# Altium PCB Copy of PCB1.PcbDoc
Units mm, origin at the board's own origin, x right, y up, seen from the top; angles counter-clockwise.
Board outline 152.4 x 101.6 mm, 6 copper layers (Top Layer 1, Top Layer, Int1 (GND), Int2 (PWR), Bottom Layer, Bottom Layer 1), stack 1.887 mm thick; 7 components, 27 nets, 107 pads, 29 vias.
Unrouted connection lines stored in the file: 37.
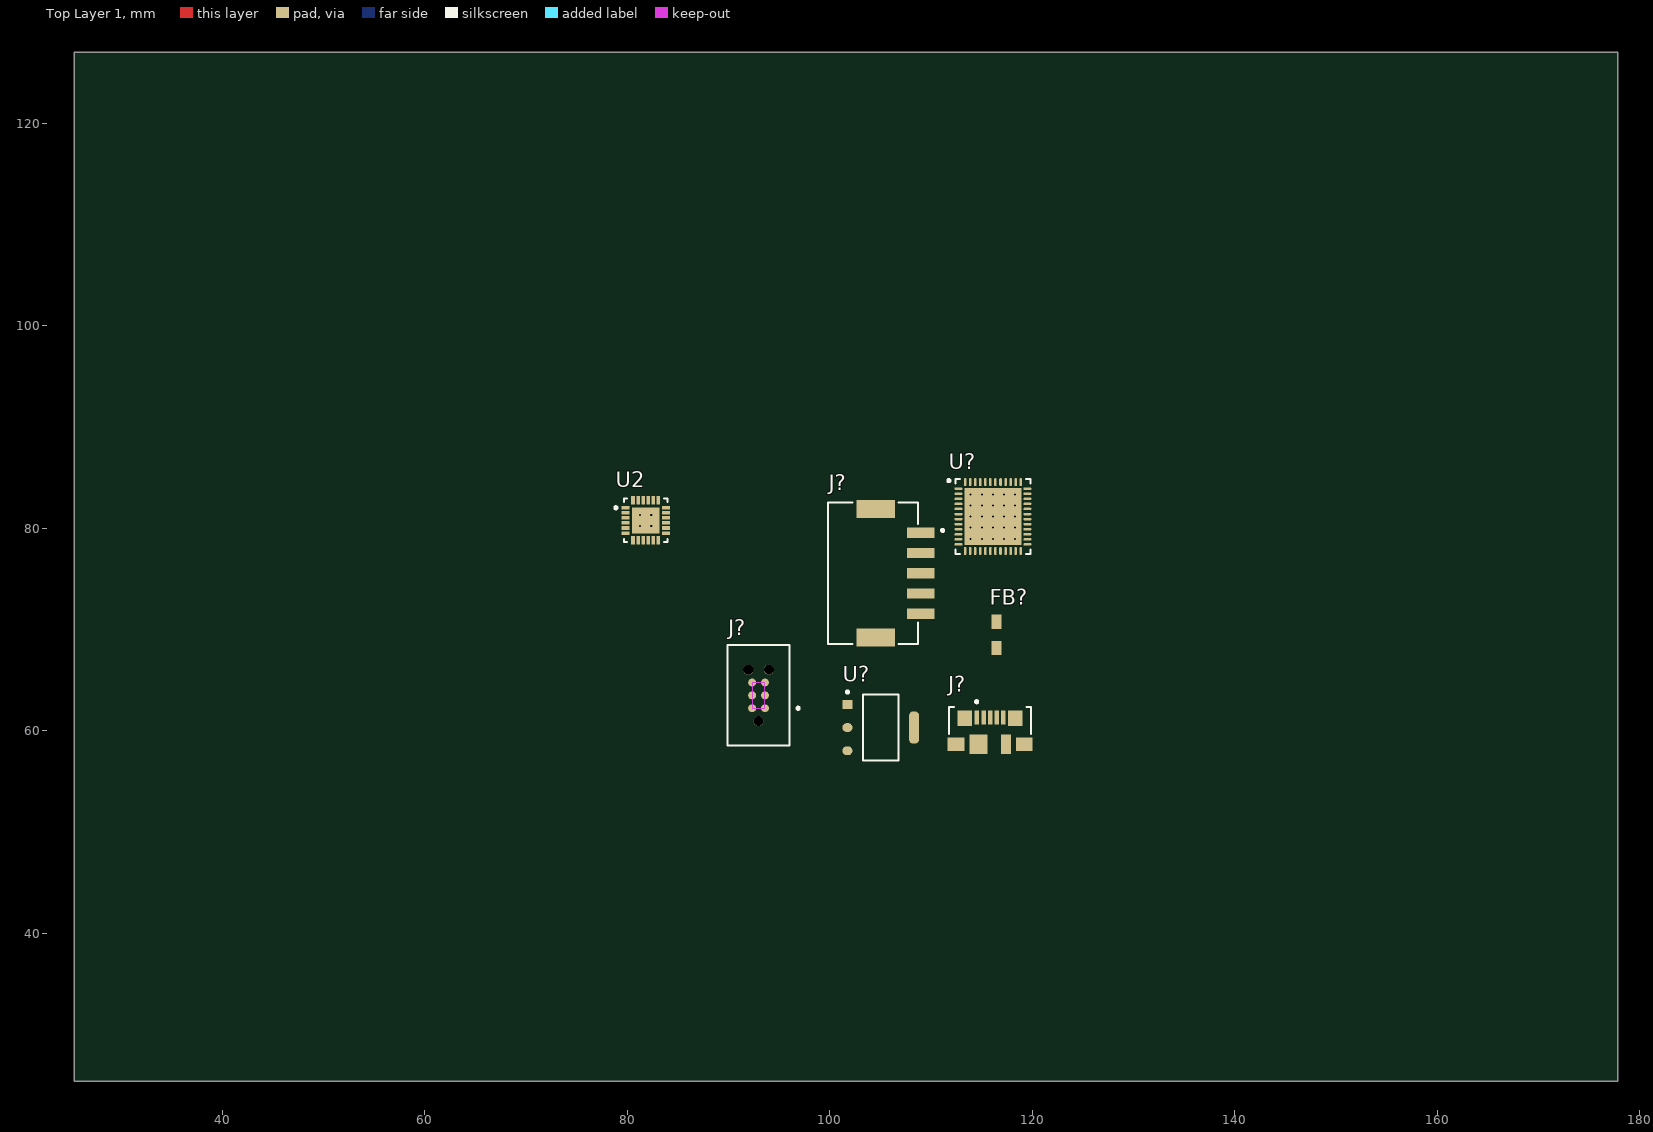
[diagram p0: Top Layer 1 view]
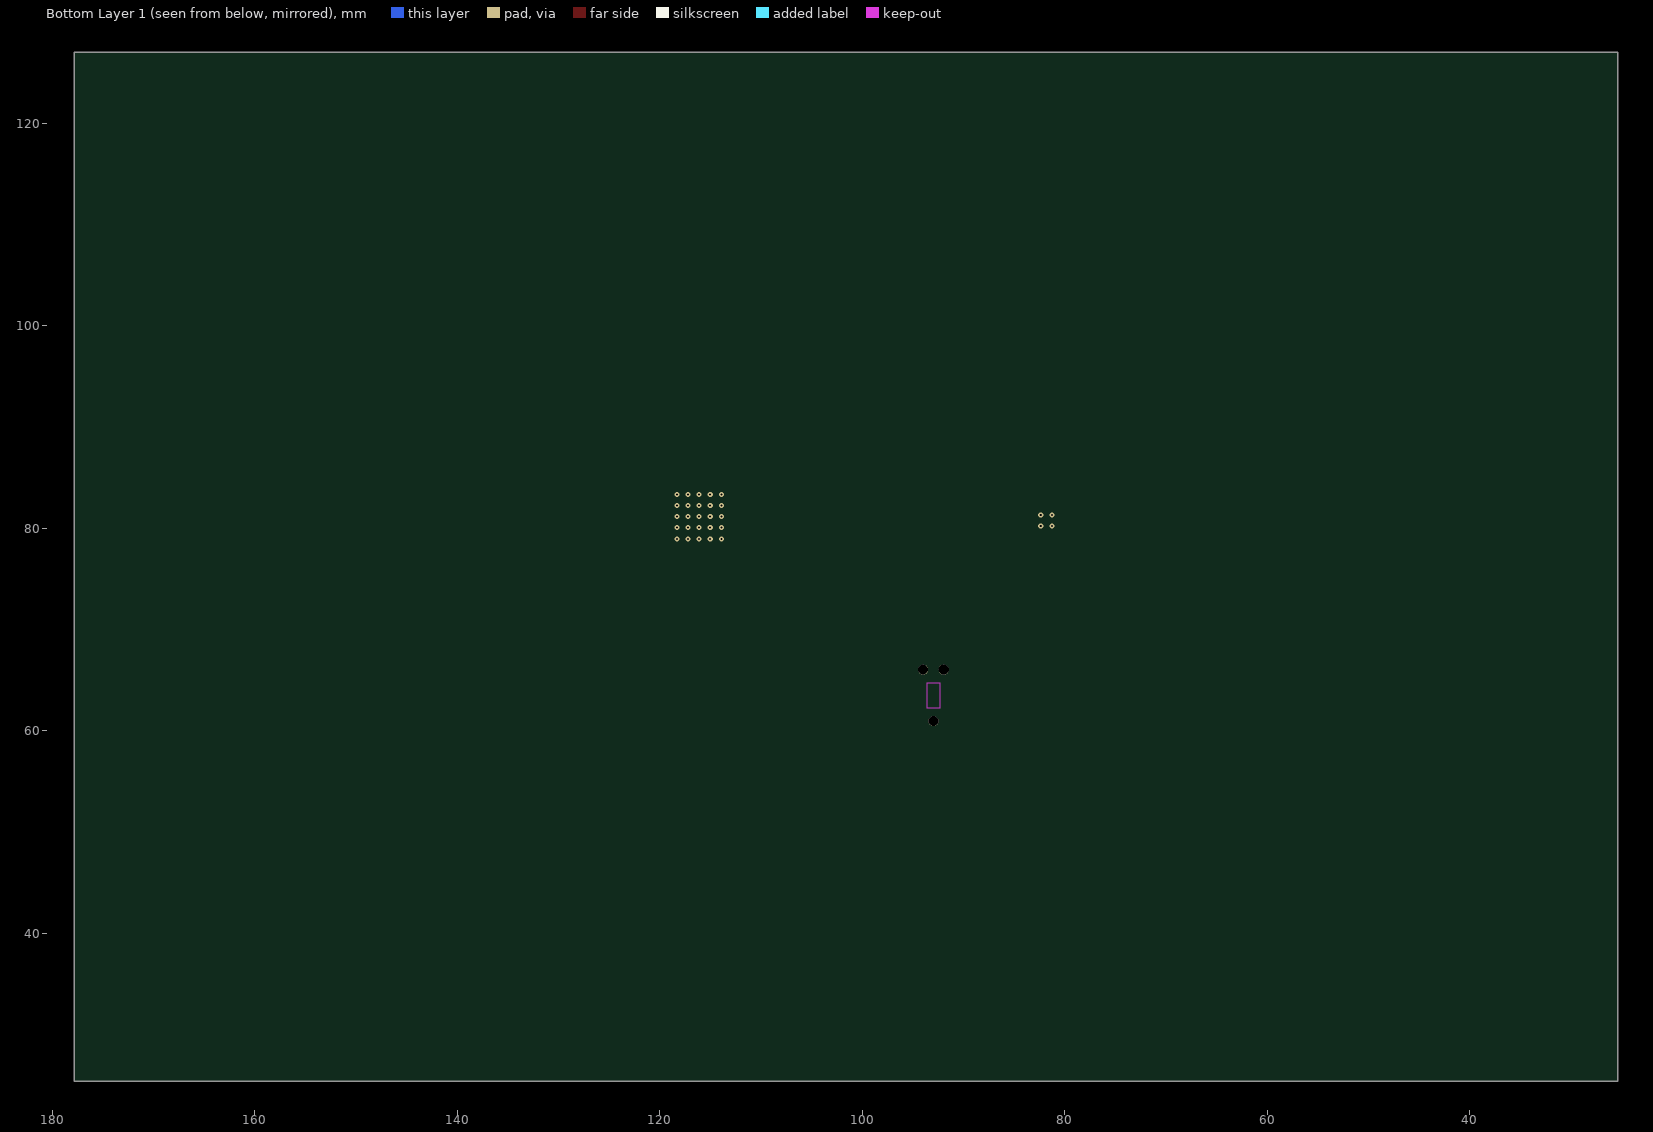
[diagram p1: Bottom Layer 1 view, seen from below]
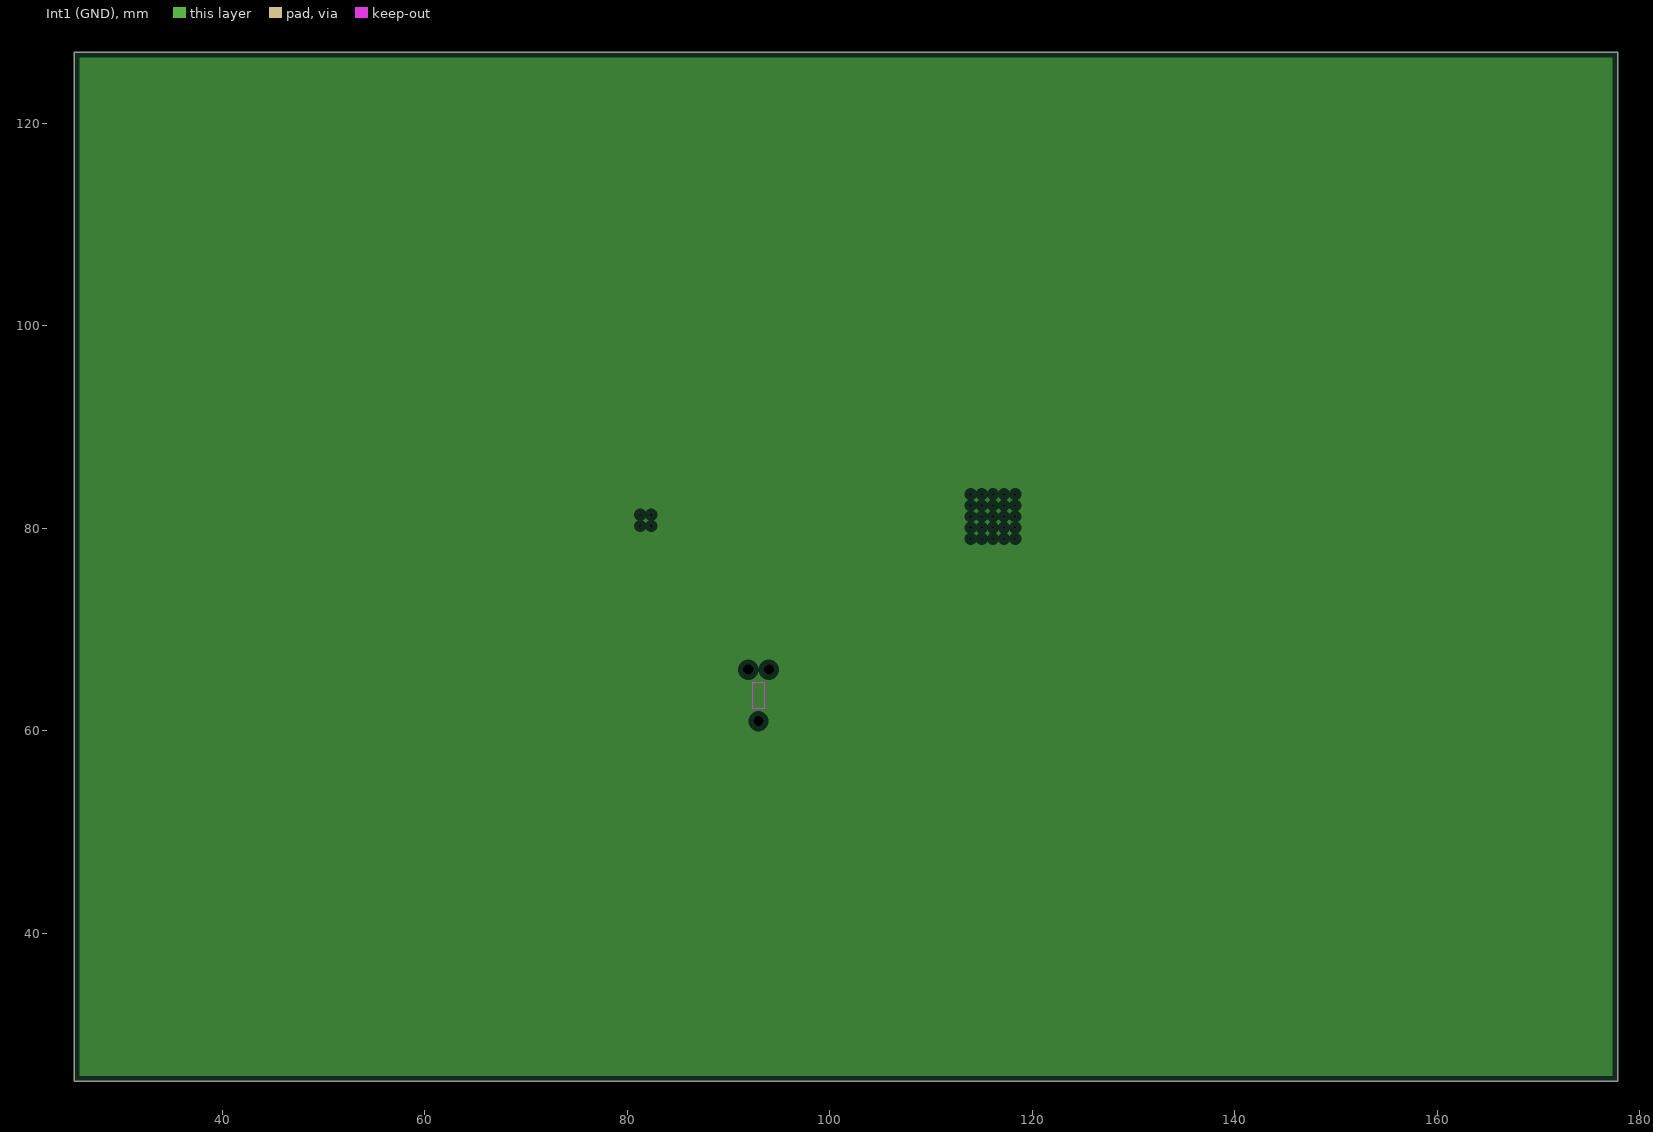
[diagram p2: Int1 (GND), clearances drawn from the general rule]
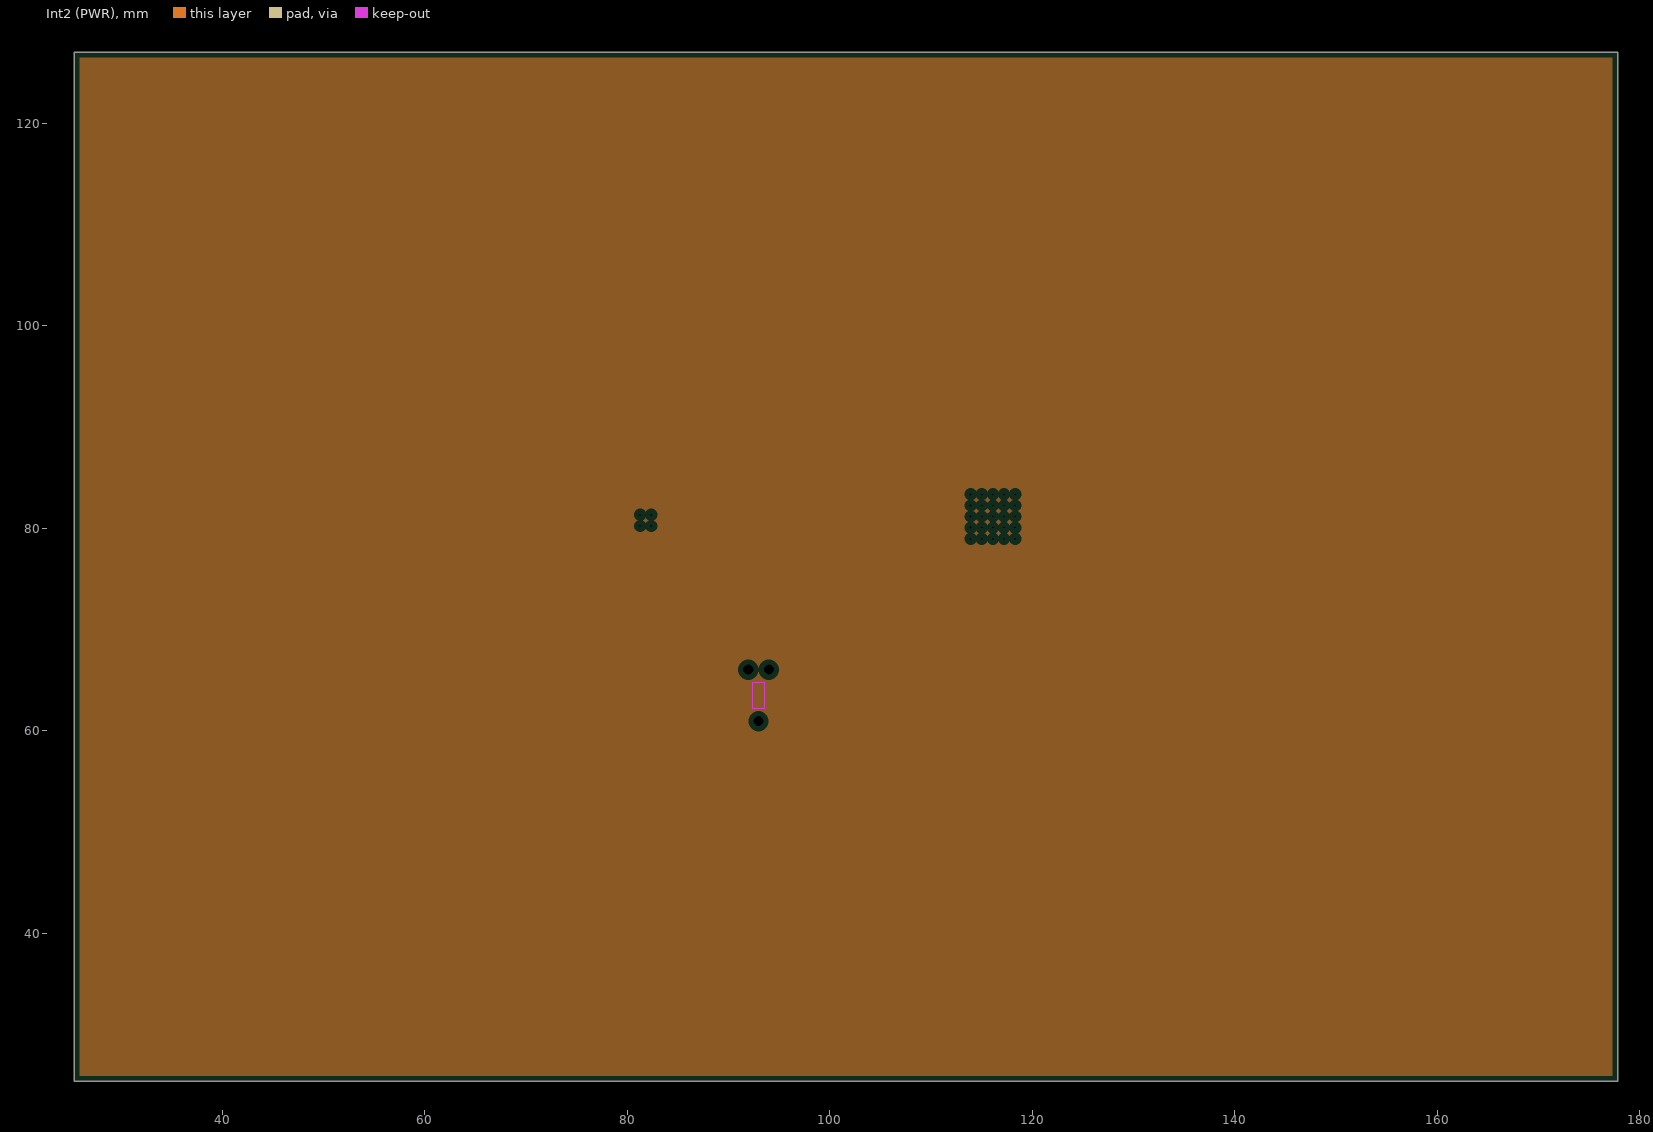
[diagram p3: Int2 (PWR), clearances drawn from the general rule]

## Layer stack, top to bottom
Top Layer 1: signal copper 0.105
Dielectric 2: prepreg 0.0711, PP-006, Dk 4.1
Top Layer: signal copper 0.0175
Dielectric 1: prepreg 0.2, PP-017, Dk 4.6
Int1 (GND): plane copper 0.0175
Dielectric 3: core 1.065, Core-039, Dk 4.6
Int2 (PWR): plane copper 0.0175
Dielectric 5: prepreg 0.2, PP-017, Dk 4.6
Bottom Layer: signal copper 0.0175
Dielectric 4: prepreg 0.0711, PP-006, Dk 4.1
Bottom Layer 1: signal copper 0.105

## Board outline
25.4,25.4 177.8,25.4 177.8,127 25.4,127

## Design rules (kind name [scope] priority, off if disabled: settings)
Clearance [All] p1: gap=0.254 ignorepadtopadclearanceinfootprint=FALSE
DiffPairsRouting [All] p1: maxlimit=0.254 minlimit=0.254 mostfreqgap=0.254 toplayer_minwidth=0.381 toplayer_maxwidth=0.381 toplayer_prefwidth=0.381 midlayer1_minwidth=0.381 midlayer1_maxwidth=0.381 midlayer1_prefwidth=0.381 midlayer2_minwidth=0.381 midlayer2_maxwidth=0.381 midlayer2_prefwidth=0.381 bottomlayer_minwidth=0.381 bottomlayer_maxwidth=0.381 bottomlayer_prefwidth=0.381 maxuncoupledlength=12.7
PlaneClearance [All] p1: clearance=0.508
PlaneConnect [All] p1: planeconnectstyle=Relief reliefexpansion=0.508 reliefentries=4 reliefconductorwidth=0.254 reliefairgap=0.254
PolygonConnect [All] p1: connectstyle=Relief reliefconductorwidth=0.254 reliefentries=4 polygonreliefangle="90 Angle" airgapwidth=0.254
RoutingVias [All] p1: holewidth=0.711 width=1.27 viastyle="Through Hole" minholewidth=0.711 minwidth=1.27 maxholewidth=0.711 maxwidth=1.27
SolderMaskExpansion [All] p1: expansion=0 istentingtop=FALSE
SupplyNets "Schematic Supply Nets_6" [InNet('NetC1_2')] p1: voltage=0.000
SupplyNets "Schematic Supply Nets_5" [InNet('VBUS')] p2: voltage=0.000
SupplyNets "Schematic Supply Nets_4" [InNet('+5V')] p3: voltage=0.000
SupplyNets "Schematic Supply Nets_3" [InNet('+3V3')] p4: voltage=0.000
SupplyNets "Schematic Supply Nets_2" [InNet('GND')] p5: voltage=0.000
SupplyNets "Schematic Supply Nets_1" [InNet('VCC')] p6: voltage=0.000
Width [All] p1: maxlimit=0.254 minlimit=0.254 preferedwidth=0.254
27 further rules are at their usual default settings.

## Classes and differential pairs
differential pair USB_D: +USB_D_P -USB_D_N

## Components (designator, comment, footprint, x,y, rotation, side; value= is the part's Value field where it differs from the comment)
FB? "120R" WE-CBF_0805_L2W1.2H0.9_HC 116.459,69.469 r90 top
J? "SM05B-PASS-TB(LF)(SN)" FP-SM05B-PASS-TB_LF_SN-MFG 104.267,75.565 r90 top
J? "DNP" FP-TC2030-MCP-NL-MFG 92.964,63.5 r90 top
J? "473460001" FP-473460001-MFG 115.831,59.024 r0 top
U2 "MPU-6050" IS-QFN-24_V 81.82,80.776 r0 top (schematic designator U?)
U? "ams1117" FP-ams1117-IPC_C 105.029,60.325 r0 top
U? "STM32F411CEU6" STM-UFQFPN48_L 116.107,81.157 r0 top

## Footprints (in the part's own frame and the unit in brackets; to place one, negate y for a bottom-side part, rotate by r counter-clockwise, add the part's x,y. Pads: shape width x height; smd on the part's side, far side on the other; paste and mask are expansions set on the pad)
FP-473460001-MFG [mm]
  rect 0.45x1.38 smd paste+0 mask+0: 1(-1.3,2.31) 2(-0.65,2.31) 3(0,2.31) 4(0.65,2.31) 5(1.3,2.31)
  rect 1.425x1.55 smd paste+0 mask+0: 6(-2.488,2.225) 7(2.488,2.225)
  rect 1.65x1.3 smd paste+0 mask+0: 8(-3.375,-0.35) 11(3.375,-0.35)
  rect 1.8x1.9 smd paste+0 mask+0: 9(-1.15,-0.35)
  rect 1x1.9 smd paste+0 mask+0: 10(1.55,-0.35)
  silkscreen extent -4.05,0.67 4.05,3.97, body extent -4.3,-2.48 4.3,3.45, height 0.25
FP-ams1117-IPC_C [mm]
  rect 1.004x0.872 smd paste+0 mask+0: 1(-3.295,2.29)
  rrect100% 1.004x0.872 smd paste+0 mask+0: 2(-3.295,0) 3(-3.295,-2.29)
  rrect87% 1.004x3.182 smd paste+0 mask+0: 4(3.295,0)
  silkscreen extent -3.42,-3.25 1.75,3.62, body extent -3.9,-3.35 3.9,3.35, height 0.25
FP-SM05B-PASS-TB_LF_SN-MFG [mm]
  rect 1x2.7 smd paste+0 mask+0: 1(4,-4.7) 2(2,-4.7) 3(0,-4.7) 4(-2,-4.7) 5(-4,-4.7)
  rect 1.8x3.8 smd paste+0 mask+0: 6(-6.35,-0.25) 7(6.35,-0.25)
  silkscreen extent -7,-7 7,4.45, body extent -7.35,-6.15 7.35,4.55, height 0.25
FP-TC2030-MCP-NL-MFG [mil]
  round 30.98 smd paste-39370.1 mask+0: 1(-50,-25) 2(-50,25) 3(0,-25) 4(0,25) 5(50,-25) 6(50,25)
  round 39.02 hole 39.02 unplated paste-99999 mask+0: ""(-100,0) ""(100,-40) ""(100,40)
  Keep-Out Layer region: -50,-25 50,-25 50,25 -50,25
  silkscreen extent -195,-159 195,120, body extent -199,-124 199,124, height 10
IS-QFN-24_V [mm] "QFN, 24-Leads, Body 4x4mm, Pitch 0.5mm, Thermal Pad 2.7x2.6mm"
  rect 0.8x0.35 smd: 1(-2,1.25) 2(-2,0.75) 3(-2,0.25) 4(-2,-0.25) 5(-2,-0.75) 6(-2,-1.25) 13(2,-1.25) 14(2,-0.75) 15(2,-0.25) 16(2,0.25) 17(2,0.75) 18(2,1.25)
  rect 0.35x0.85 smd mask+0.102: 7(-1.25,-1.975) 8(-0.75,-1.975) 9(-0.25,-1.975) 10(0.25,-1.975) 11(0.75,-1.975) 12(1.25,-1.975) 19(1.25,1.975) 20(0.75,1.975) 21(0.25,1.975) 22(-0.25,1.975) 23(-0.75,1.975) 24(-1.25,1.975)
  rect 2.7x2.6 smd: 25(0,0)
  silkscreen extent -3.07,-2.15 2.15,2.15, body extent -2,-2 2,2, height 0.95
STM-UFQFPN48_L [mm] "QFN, 48-Leads, Body 7.1x7.1mm, Pitch 0.5mm, Thermal Pad 5.6x5.6mm, IPC High Density"
  oval 0.8x0.25 smd: 1(-3.4,2.75) 2(-3.4,2.25) 3(-3.4,1.75) 4(-3.4,1.25) 5(-3.4,0.75) 6(-3.4,0.25) 7(-3.4,-0.25) 8(-3.4,-0.75) 9(-3.4,-1.25) 10(-3.4,-1.75) 11(-3.4,-2.25) 12(-3.4,-2.75) 25(3.4,-2.75) 26(3.4,-2.25) 27(3.4,-1.75) 28(3.4,-1.25) 29(3.4,-0.75) 30(3.4,-0.25) 31(3.4,0.25) 32(3.4,0.75) 33(3.4,1.25) 34(3.4,1.75) 35(3.4,2.25) 36(3.4,2.75)
  oval 0.25x0.8 smd: 13(-2.75,-3.4) 14(-2.25,-3.4) 15(-1.75,-3.4) 16(-1.25,-3.4) 17(-0.75,-3.4) 18(-0.25,-3.4) 19(0.25,-3.4) 20(0.75,-3.4) 21(1.25,-3.4) 22(1.75,-3.4) 23(2.25,-3.4) 24(2.75,-3.4) 37(2.75,3.4) 38(2.25,3.4) 39(1.75,3.4) 40(1.25,3.4) 41(0.75,3.4) 42(0.25,3.4) 43(-0.25,3.4) 44(-0.75,3.4) 45(-1.25,3.4) 46(-1.75,3.4) 47(-2.25,3.4) 48(-2.75,3.4)
  rect 5.6x5.6 smd: 49(0,0)
  silkscreen extent -4.47,-3.7 3.7,3.7, body extent -3.55,-3.55 3.55,3.55, height 0.6
WE-CBF_0805_L2W1.2H0.9_HC [mm] "SMD EMI Suppression Ferrite  Bead, body 2.00x1.20mm"
  rect 1.4x1 smd: 1(-1.3,0) 2(1.3,0)
  body extent -1,-0.6 1,0.6, height 0.9

## Part data
FB?: library part CMP-03913-130924299-1, "742792025 Ferrite Bead, Suppression, 120 Ohm, 5A Rohs Compliant: Yes", Current Rating=3A, Max Operating Temperature=125°C, Min Operating Temperature=-55°C, Height=900µm, Length=2mm, NexarPartId=130924299, RoHS=Compliant, Width=1.2mm
J?: library part CMP-17439-000533-1, "Wire-To-Board Connector, Pa Series, Surface Mount, Header, 5, 2 Mm, Tin Plated Contacts Rohs Compliant: Yes", Color=Beige, Contact Material=Copper, Contact Plating=Tin, Gender=Male, Lead Free="Lead Free", Mount="Surface Mount", Number Of Contacts=5, Number of Positions=5, Number of Rows=1, Packaging="Cut Tape", Pitch=2mm, Reach SVHC Compliant=Yes, Termination=Crimp
J?: library part CMP-205963-000002-1, "CABLE TAG-CONNECT IN-CIRCUIT", Package Quantity=1, Lead Free="Lead Free", Reach SVHC Compliant=Yes, RoHS Compliant=Yes, Series=-
J?: library part CMP-2000-05246-2, "CONN RCPT USB2.0 MICRO B SMD R/A", Current Rating=1.8A, Manufacturer=Molex, Package=0, Temperature="-30°C to +85°C", Temperature Range High=+85°C, Temperature Range Low=-30°C, Voltage Rating=30V, Automotive=No, Category=Conn, ComponentLink2Description=Datasheet, ComponentLink2URL=https://www.molex.com/webdocs/datasheets/pdf/en-us/0473460001_IO_CONNECTORS.pdf, Conn Orientation="Right Angle", Contact Material=Gold,Nickel, Device Class L1=Connectors, Device Class L2="USB Connectors", Device Class L3=unset, Digikey Description="CONN RCPT USB2.0 MICRO B SMD R/A", Footprint Url=https://www.molex.com/pdm_docs/sd/473460001_sd.pdf, Height=2.945mm, Is Female=yes, Lead Free=Yes, Manufacturer Part Number=473460001, Number Of Contacts=5, Octopart=https://octopart.com/47346-0001-molex-7164928, Pitch=0.65mm, RoHS=TRUE, Shielding=true, Usb Standard="USB 2.0"
U2: library part CMP-1753-00002-2, "3-Axis Gyroscope, Accelerometer and a Digital Motion Processor(TM) (DMP), 2.375 to 3.46 V, -40 to 85 degC, 24-Pin QFN, RoHS, Tape and Reel", Manufacturer=InvenSense, Standard Package=5,000, Category=Sensors,Transducers, Datasheet URL=http://datasheet.octopart.com/MPU-6050-InvenSense-datasheet-14421344.pdf, Datasheet Version="Rev. 3.3, 05/2012", Dynamic Catalog=MPU-6000™Series, Family=Multifunction, Featured Product=MPU-60506-Axis,IntegratedI²CSolution, Manufacturer URL=http://www.invensense.com/, Online Catalog=MPU-6000™Series, Other Names="1428-1007-2 / MPU6050", Output Type=Digital, Sensor Type=MotionTracking, Unit PriceUSD=Digital
U?: library part CMP-209535-000002-1, "1A LOW DROPOUT VOLTAGE REGULATOR", RoHS Compliant=Yes
U?: library part CMP-0243-00165-1, "ARM Cortex-M4 32-bit MCU+FPU, 512 KB Flash, 128 KB RAM, 36 I/Os, 48-Pin UFQFPN, -40 to 85 degC, Tray", I/Os (High Current)=36, Operating Frequency(F) (Processor speed) (MHz)=100, Package Description=UFQFPN48, Package Reference="48-Pin Ultra Thin Fine Pitch Quad Flat No-Lead, 7 x 7 x 0.6 mm Body, 0.5 mm Pitch, Exposed Pad", Supply Voltage(Vcc) min (V)=1.7, ComponentLink1Description="Manufacturer URL", ComponentLink1URL=http://www.st.com/, ComponentLink2Description=Datasheet, ComponentLink2URL=http://www.st.com/st-web-ui/static/active/en/resource/technical/document/datasheet/DM00115249.pdf, Core="ARM Cortex-M4", DatasheetVersion="Rev. 6", FLASH Size (Prog) (kB)=512, Internal RAM Size (kB)=128, Mounting Technology="Surface Mount", Packing=Tray

## Via types
v1: diameter 0.5, hole 0.2, Top Layer 1 to Bottom Layer 1, 29 vias

## Nets (pads, with @x,y where several pads share a name; then routed paths per layer and width w, separated by ;. In a path a pad name is that pad's centre, name@x,y a point inside that pad or via, vN(x,y) a via of type N, cw(c..) or ccw(c..) an arc to the next point about the centre after c; other vN are vias at no path point)
+3V3: J?.1@108.967,79.565 U2.8 U2.13 U?.1@112.707,83.907 U?.2@101.734,60.325 U?.4@108.324,60.325 U?.9 U?.24 U?.36 U?.48
+5V: FB?.2 U?.3@101.734,58.035
GND: J?.3@93.599,63.5
IMU_CPOUT: U2.20
IMU_INT: U2.12 U?.45
IMU_REGOUT: U2.10
IMU_SCL: U2.23 U2.24 U?.42 U?.43
MCU_BOOT0: U?.44
MCU_LED_A: U?.26
MCU_OSC_IN: U?.5
MCU_OSC_OUT: U?.6
MCU_PA4: J?.2@108.967,77.565 U?.14
MCU_PA5: J?.3@108.967,75.565 U?.15
MCU_PA6: J?.4@108.967,73.565 U?.16
MCU_PA7: J?.5@108.967,71.565 U?.17
MCU_SWCLK: U?.37
MCU_SWDIO: U?.34
MCU_SWO: U?.39
MCU_VCAP1: U?.22
NetC1_2: J?.5@117.131,61.334 J?.6@113.343,61.249 J?.7 J?.8 J?.9 J?.10 J?.11 U2.1 U2.9 U2.11 U2.18 U2.25 U?.1@101.734,62.615 U?.8 U?.23 U?.35 U?.47 U?.49
  other v1: 113.907,78.957 115.007,78.957 116.107,78.957 117.207,78.957 118.307,78.957 113.907,80.057 115.007,80.057 116.107,80.057 117.207,80.057 118.307,80.057 81.27,80.226 82.37,80.226 113.907,81.157 115.007,81.157 116.107,81.157 117.207,81.157 118.307,81.157 81.27,81.326 82.37,81.326 113.907,82.257 115.007,82.257 116.107,82.257 117.207,82.257 118.307,82.257 113.907,83.357 115.007,83.357 116.107,83.357 117.207,83.357 118.307,83.357
NetD1_2: 
NetD2_2: 
USB_D_N: J?.2@115.181,61.334
USB_D_P: J?.3@115.831,61.334
VBUS: FB?.1 J?.1@114.531,61.334
VCC: J?.2@92.329,62.23
XTAL_IN: 
pads on no net: J?. J?.1@93.599,62.23 J?.4@92.329,63.5 J?.4@116.481,61.334 J?.5@93.599,64.77 J?.6@92.329,64.77 J?.6@104.517,69.215 U2.2 U2.3 U2.4 U2.5 U2.6 U2.7 U2.14 U2.15 U2.16 U2.17 U2.19 U2.21 U2.22 U?.2@112.707,83.407 U?.3@112.707,82.907 U?.4@112.707,82.407 U?.7 U?.10 U?.11 U?.12 U?.13 U?.18 U?.19 U?.20 U?.21 U?.25 U?.27 U?.28 U?.29 U?.30 U?.31 U?.32 U?.33 U?.38 U?.40 U?.41 U?.46

## Polygon pours and split planes (outlines as drawn)
no net on Int1 (GND) (split plane): 177.29,25.91 25.91,25.91 25.91,126.49 177.29,126.49
no net on Int2 (PWR) (split plane): 177.29,25.91 25.91,25.91 25.91,126.49 177.29,126.49